# EAGLE board Leiterplatte_Vorlage v1 (EAGLE 9.7.0)
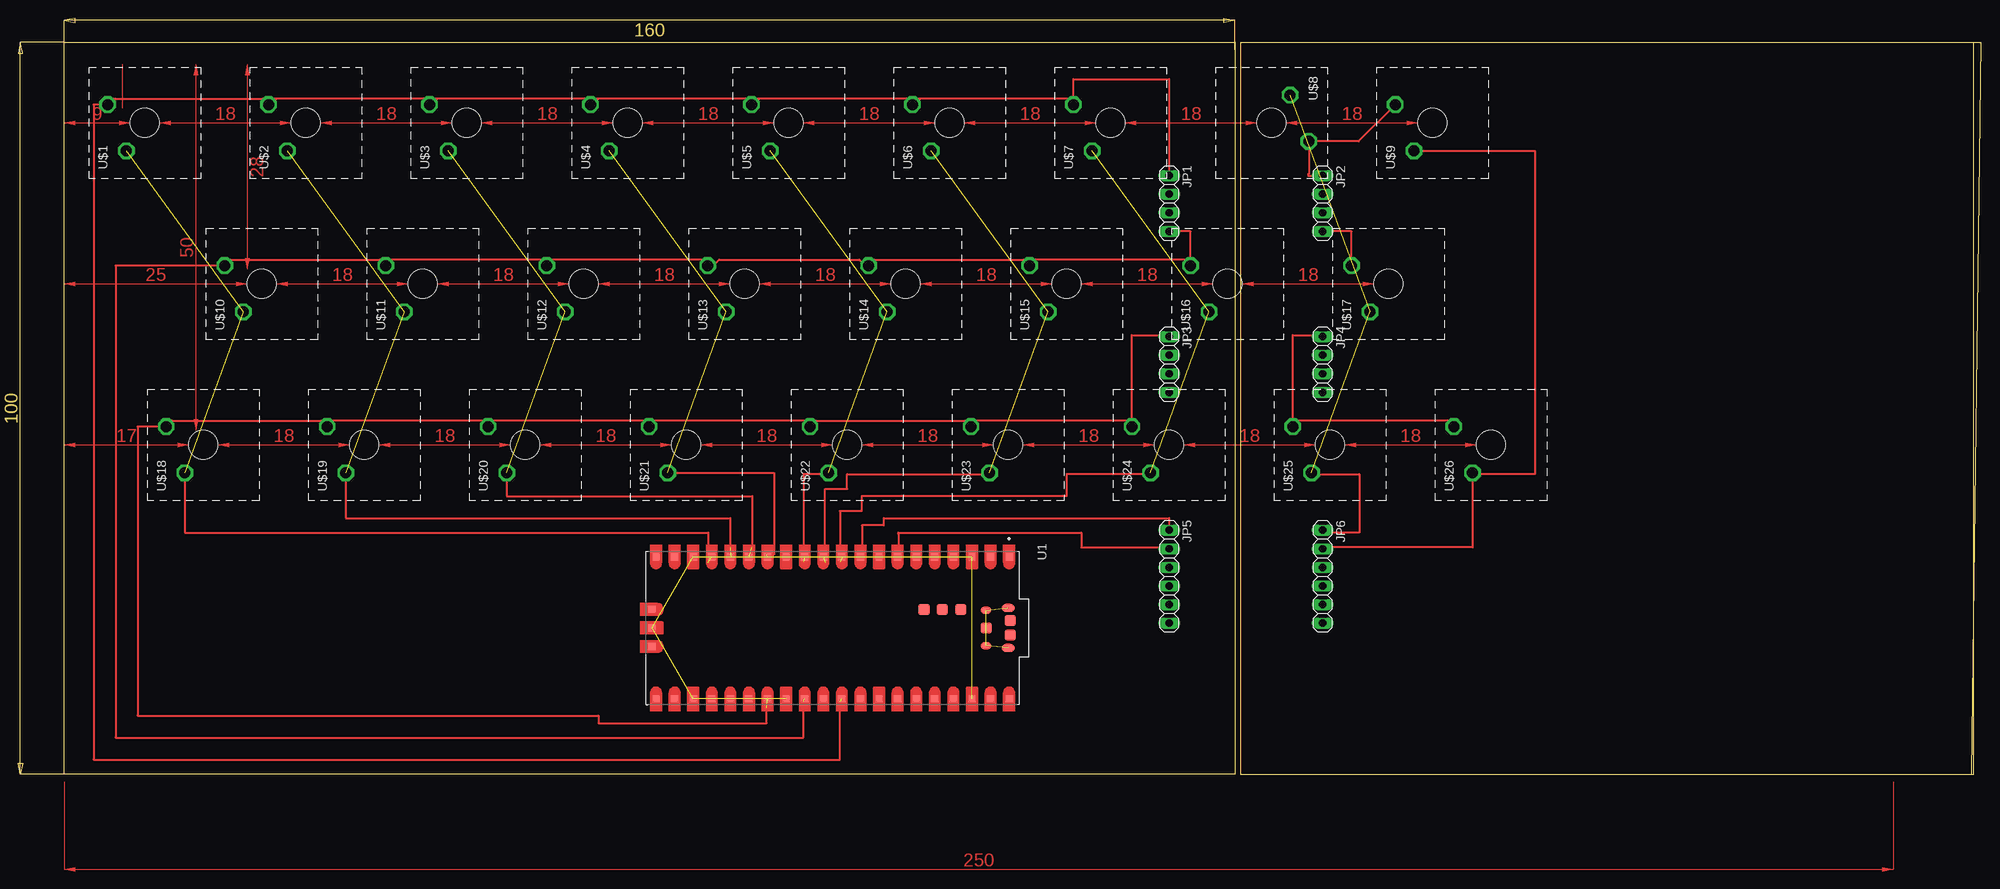
[diagram p0: board, top side]

Size 262 x 100 mm. Coordinates in mm from the lower left corner, seen from the top.
Outline: 0,0 0,100 160,100 160,0 0,0
Outline: 160.73,100 160.73,0 260.73,0 262,100 160.73,100
Copper layers (1*16): Top / Bottom
Stack-up Default Layer Stack: Top User Defined 0.035mm / Dielectric-1 User Defined 1.5mm / Bottom User Defined 0.035mm
Design rules: minimum copper width 6mil, minimum drill size 0.35mm, copper clearance wire_polygon to wire_polygon 6mil, copper clearance wire_polygon to pad_smd 6mil, copper clearance wire_polygon to via 6mil, copper clearance pad_smd to pad_smd 6mil, copper clearance pad_smd to via 6mil, copper clearance via to via 6mil, copper clearance smd to pad (same net) 6mil, copper clearance smd to via (same net) 6mil, copper clearance smd to smd (same net) 6mil, dimension clearance 40mil, via restrict clearance 0mil, restrict clearance 0mil, drill distance 6mil, keepout clearance 0mil

## Footprints (pad centres in the part's own frame; a part is rotated, then mirrored left to right if it is on the bottom)
1X04 = drill 1.016 long: 1 -3.81,0; 2 -1.27,0; 3 1.27,0; 4 3.81,0
1X06 = drill 1.016 long: 1 -6.35,0; 2 -3.81,0; 3 -1.27,0; 4 1.27,0; 5 3.81,0; 6 6.35,0
MODULE_SC0917 = smd 1 x 1: 1 -9.69,24.13; 2 -9.69,21.59; 3 -9.69,19.05; 4 -9.69,16.51; 5 -9.69,13.97; 6 -9.69,11.43; 7 -9.69,8.89; 8 -9.69,6.35; 9 -9.69,3.81; 10 -9.69,1.27; 11 -9.69,-1.27; 12 -9.69,-3.81; 13 -9.69,-6.35; 14 -9.69,-8.89; 15 -9.69,-11.43; 16 -9.69,-13.97; 17 -9.69,-16.51; 18 -9.69,-19.05; 19 -9.69,-21.59; 20 -9.69,-24.13; 21 9.69,-24.13; 22 9.69,-21.59; 23 9.69,-19.05; 24 9.69,-16.51; 25 9.69,-13.97; 26 9.69,-11.43; 27 9.69,-8.89; 28 9.69,-6.35; 29 9.69,-3.81; 30 9.69,-1.27; 31 9.69,1.27; 32 9.69,3.81; 33 9.69,6.35; 34 9.69,8.89; 35 9.69,11.43; 36 9.69,13.97; 37 9.69,16.51; 38 9.69,19.05; 39 9.69,21.59; 40 9.69,24.13; D1 -2.54,-24.7; D2 0,-24.7; D3 2.54,-24.7 | smd 1.1 x 1.8: A -2.725,24; B 2.725,24 | smd 1.05 x 1.45: C -2.425,20.97; D 2.425,20.97 | smd 1.5 x 1.5: TP1 0,21; TP2 1,24.3; TP3 -1,24.3; TP4 -2.5,17.5; TP5 -2.5,15; TP6 -2.5,12.5
CHERRY_MX1A-11NN_SWITCH = drill 1.5 octagon: P$1 2.51,5.08; P$2 -3.81,2.54 | hole 3.988: 0,0

## Placement (x,y rotation side)
JP1  PINHD-1X4  [1X04]  151,78 270 top
JP2  PINHD-1X4  [1X04]  172,78 270 top
JP3  PINHD-1X4  [1X04]  151,56 270 top
JP4  PINHD-1X4  [1X04]  172,56 270 top
JP5  PINHD-1X6  [1X06]  151,27 270 top
JP6  PINHD-1X6  [1X06]  172,27 270 top
U1  SC0917  [MODULE_SC0917]  105,20 270 top
U$1  GEILER_TASTER  [CHERRY_MX1A-11NN_SWITCH]  11,89 90 top
U$2  GEILER_TASTER  [CHERRY_MX1A-11NN_SWITCH]  33,89 90 top
U$3  GEILER_TASTER  [CHERRY_MX1A-11NN_SWITCH]  55,89 90 top
U$4  GEILER_TASTER  [CHERRY_MX1A-11NN_SWITCH]  77,89 90 top
U$5  GEILER_TASTER  [CHERRY_MX1A-11NN_SWITCH]  99,89 90 top
U$6  GEILER_TASTER  [CHERRY_MX1A-11NN_SWITCH]  121,89 90 top
U$7  GEILER_TASTER  [CHERRY_MX1A-11NN_SWITCH]  143,89 90 top
U$8  GEILER_TASTER  [CHERRY_MX1A-11NN_SWITCH]  165,89 270 top
U$9  GEILER_TASTER  [CHERRY_MX1A-11NN_SWITCH]  187,89 90 top
U$10  GEILER_TASTER  [CHERRY_MX1A-11NN_SWITCH]  27,67 90 top
U$11  GEILER_TASTER  [CHERRY_MX1A-11NN_SWITCH]  49,67 90 top
U$12  GEILER_TASTER  [CHERRY_MX1A-11NN_SWITCH]  71,67 90 top
U$13  GEILER_TASTER  [CHERRY_MX1A-11NN_SWITCH]  93,67 90 top
U$14  GEILER_TASTER  [CHERRY_MX1A-11NN_SWITCH]  115,67 90 top
U$15  GEILER_TASTER  [CHERRY_MX1A-11NN_SWITCH]  137,67 90 top
U$16  GEILER_TASTER  [CHERRY_MX1A-11NN_SWITCH]  159,67 90 top
U$17  GEILER_TASTER  [CHERRY_MX1A-11NN_SWITCH]  181,67 90 top
U$18  GEILER_TASTER  [CHERRY_MX1A-11NN_SWITCH]  19,45 90 top
U$19  GEILER_TASTER  [CHERRY_MX1A-11NN_SWITCH]  41,45 90 top
U$20  GEILER_TASTER  [CHERRY_MX1A-11NN_SWITCH]  63,45 90 top
U$21  GEILER_TASTER  [CHERRY_MX1A-11NN_SWITCH]  85,45 90 top
U$22  GEILER_TASTER  [CHERRY_MX1A-11NN_SWITCH]  107,45 90 top
U$23  GEILER_TASTER  [CHERRY_MX1A-11NN_SWITCH]  129,45 90 top
U$24  GEILER_TASTER  [CHERRY_MX1A-11NN_SWITCH]  151,45 90 top
U$25  GEILER_TASTER  [CHERRY_MX1A-11NN_SWITCH]  173,45 90 top
U$26  GEILER_TASTER  [CHERRY_MX1A-11NN_SWITCH]  195,45 90 top

## Library data of the parts
JP1-JP4 = Connector; CATEGORY: Headers; DESCRIPTION: Header-Straight-4 Position; PACKAGE_TYPE: THT; PITCH: 0.100" (2.54mm); SUBCATEGORY: Headers-Male Pins; TYPE: Board to Board or Cable-Unshrouded-Through Hole-Straight
JP5 JP6 = Connector; CATEGORY: Headers; DESCRIPTION: Header-Straight-6 Position; PACKAGE_TYPE: THT; PITCH: 0.100" (2.54mm); SUBCATEGORY: Headers-Male Pins; TYPE: Board to Board or Cable-Unshrouded-Through Hole-Straight
U1 = SC0917; AVAILABILITY: In Stock; CHECK_PRICES: https://www.snapeda.com/parts/SC0917/Raspberry+Pi/view-part/?ref=eda; DESCRIPTION: RP2040 Raspberry Pi Pico - ARM® Cortex®-M0+ MCU 32-Bit Embedded Evaluation Board; MF: Raspberry Pi; MP: SC0917; PACKAGE: None; PRICE: None; SNAPEDA_LINK: https://www.snapeda.com/parts/SC0917/Raspberry+Pi/view-part/?ref=snap
U$1-U$26 = Hammer_Taster; AVAILABILITY: In Stock; CHECK_PRICES: https://www.snapeda.com/parts/MX1A-11NN/Cherry/view-part/?ref=eda; DESCRIPTION: Switch,Key,SPST-NO,Keyboard,Low Profile,10mA,12VDC,Face Place Mount,Std Force | Cherry Americas MX1A-11NN; MF: Cherry; MP: MX1A-11NN; PACKAGE: None; PRICE: None; SNAPEDA_LINK: https://www.snapeda.com/parts/MX1A-11NN/Cherry/view-part/?ref=snap

## Nets
3V3_OUT: U1.36
ADC_VREF: U1.35
AGND: U1.33
GND: U1.3 U1.8 U1.13 U1.18 U1.23 U1.28 U1.38 U1.D2
N$1: JP1.1 U1.31 U$1.P$1 U$2.P$1 U$3.P$1 U$4.P$1 U$5.P$1 U$6.P$1 U$7.P$1
N$2: JP1.4 U1.29 U$10.P$1 U$11.P$1 U$12.P$1 U$13.P$1 U$14.P$1 U$15.P$1 U$16.P$1
N$3: JP3.1 U1.27 U$18.P$1 U$19.P$1 U$20.P$1 U$21.P$1 U$22.P$1 U$23.P$1 U$24.P$1
N$4: U1.17 U$1.P$2 U$10.P$2 U$18.P$2
N$5: U1.16 U$2.P$2 U$11.P$2 U$19.P$2
N$6: U1.15 U$3.P$2 U$12.P$2 U$20.P$2
N$7: JP4.1 U$25.P$1 U$26.P$1
N$11: JP2.1 U$8.P$1 U$9.P$1
N$12: JP2.4 U$17.P$1
N$13: JP6.1 U$8.P$2 U$17.P$2 U$25.P$2
N$14: JP6.2 U$9.P$2 U$26.P$2
N$16: U1.14 U$4.P$2 U$13.P$2 U$21.P$2
N$17: U1.12 U$5.P$2 U$14.P$2 U$22.P$2
N$18: U1.11 U$6.P$2 U$15.P$2 U$23.P$2
N$19: U1.10 U$7.P$2 U$16.P$2 U$24.P$2
N$20: JP5.1 U1.9
N$21: JP5.2 U1.7
TP1_GND: U1.TP1
USB_SHIELD: U1.A U1.B U1.C U1.D
VBUS: U1.40
VSYS: U1.39

## Tracks (layer width: path | path; a pad name or v marks a point on that pad's centre or on a via)
GND  (7 unrouted)
N$1  (1 unrouted)
  Top 0.3: 6.72,92.31 7,92.31 | 7,92.31 27.12,92.31 U$2.P$1 28.2,91.51 29,92.31 | 29,92.31 49.12,92.31 U$3.P$1 50.2,91.51 51,92.31 | 29,92.31 28.72,92.31 | 51,92.31 71.12,92.31 U$4.P$1 72.2,91.51 73,92.31 | 51,92.31 50.72,92.31 | 73,92.31 93.12,92.31 U$5.P$1 94.2,91.51 95,92.31 | 73,92.31 72.72,92.31 | 95,92.31 115.12,92.31 U$6.P$1 116.2,91.51 117,92.31 | 95,92.31 94.72,92.31 | U$7.P$1 137.12,92.31 117,92.31 | 117,92.31 116.72,92.31 | 7,92.31 6.2,91.51 U$1.P$1 4,91.51 4,2 106,2 106,10 | U$7.P$1 138,91.51 | U$7.P$1 137.92,95 151,95 JP1.1
N$2  (1 unrouted)
  Top 0.3: U$16.P$1 153.12,70.31 132.72,70.31 U$15.P$1 131.12,70.31 110.72,70.31 U$14.P$1 | U$14.P$1 109.49,69.51 109,70 | 109,70 108.68,70.32 89.51,70.32 88.31,69.12 U$13.P$1 87.12,70.31 66.72,70.31 U$12.P$1 65.12,70.31 44.72,70.31 U$11.P$1 43.12,70.31 22.72,70.31 U$10.P$1 7,69.51 7,5 101,5 101,10 | 109,70 U$14.P$1 | U$16.P$1 154,69.51 | U$16.P$1 153.92,74.19 JP1.4
N$3  (1 unrouted)
  Top 0.3: U$22.P$1 102.72,48.31 123.12,48.31 U$23.P$1 124.72,48.31 145.12,48.31 U$24.P$1 145.92,60 151,60 JP3.1 | 102.53,46.9 U$22.P$1 | U$22.P$1 101.12,48.31 80.72,48.31 U$21.P$1 79.12,48.31 58.72,48.31 U$20.P$1 57.12,48.31 36.72,48.31 U$19.P$1 35.12,48.31 14.72,48.31 U$18.P$1 10,47.51 10,8 73,8 73,7 96,7 96,9
N$4  (3 unrouted)
  Top 0.3: U$18.P$2 16.46,33 88,33 88,29
N$5  (3 unrouted)
  Top 0.3: U$19.P$2 38.46,35 91,35 91,31
N$6  (3 unrouted)
  Top 0.3: U$20.P$2 60.46,38 94,38 94,31
N$7
  Top 0.3: U$26.P$1 189.12,48.31 168.72,48.31 U$25.P$1 167.92,60 172,60 JP4.1
N$11
  Top 0.3: U$9.P$1 176.9,86.49 U$8.P$1 | 170,86.49 U$8.P$1 | U$8.P$1 170.08,82 170,82 170,81.81 JP2.1
N$12
  Top 0.3: U$17.P$1 175.92,74.19 JP2.4
N$13  (2 unrouted)
  Top 0.3: U$25.P$2 170.46,41 177,41 177,33 172,33 JP6.1
N$14
  Top 0.3: U$9.P$2 201,85.19 201,41 192.46,41 U$26.P$2 192.46,31 172,31 JP6.2
N$16  (3 unrouted)
  Top 0.3: U$21.P$2 97,41.19 97,30 96,30
N$17  (3 unrouted)
  Top 0.3: U$22.P$2 104.46,41 101,41 101,29
N$18  (3 unrouted)
  Top 0.3: U$23.P$2 126.46,41 107,41 107,39 104,39 104,29
N$19  (3 unrouted)
  Top 0.3: U$24.P$2 148.46,41 137,41 137,38 109,38 109,36 106,36 106,29
N$20
  Top 0.3: U1.9 109,29.69 109,34 112,34 112,35 151,35 JP5.1
N$21
  Top 0.152: 113.89,32.89 114,33
  Top 0.3: U1.7 114,29.8 114,33 139,33 139,31 151,31 JP5.2
USB_SHIELD  (3 unrouted)
(copper drawn outside any net)
  shapes: Top area x30